# Altium PCB PCB1.PcbDoc
Units mm, origin at the board's own origin, x right, y up, seen from the top; angles counter-clockwise.
Board outline 24 x 61.98 mm, 2 copper layers (Top Layer, Bottom Layer); 16 components, 11 nets, 35 pads, 0 vias.
Unrouted connection lines stored in the file: 22.
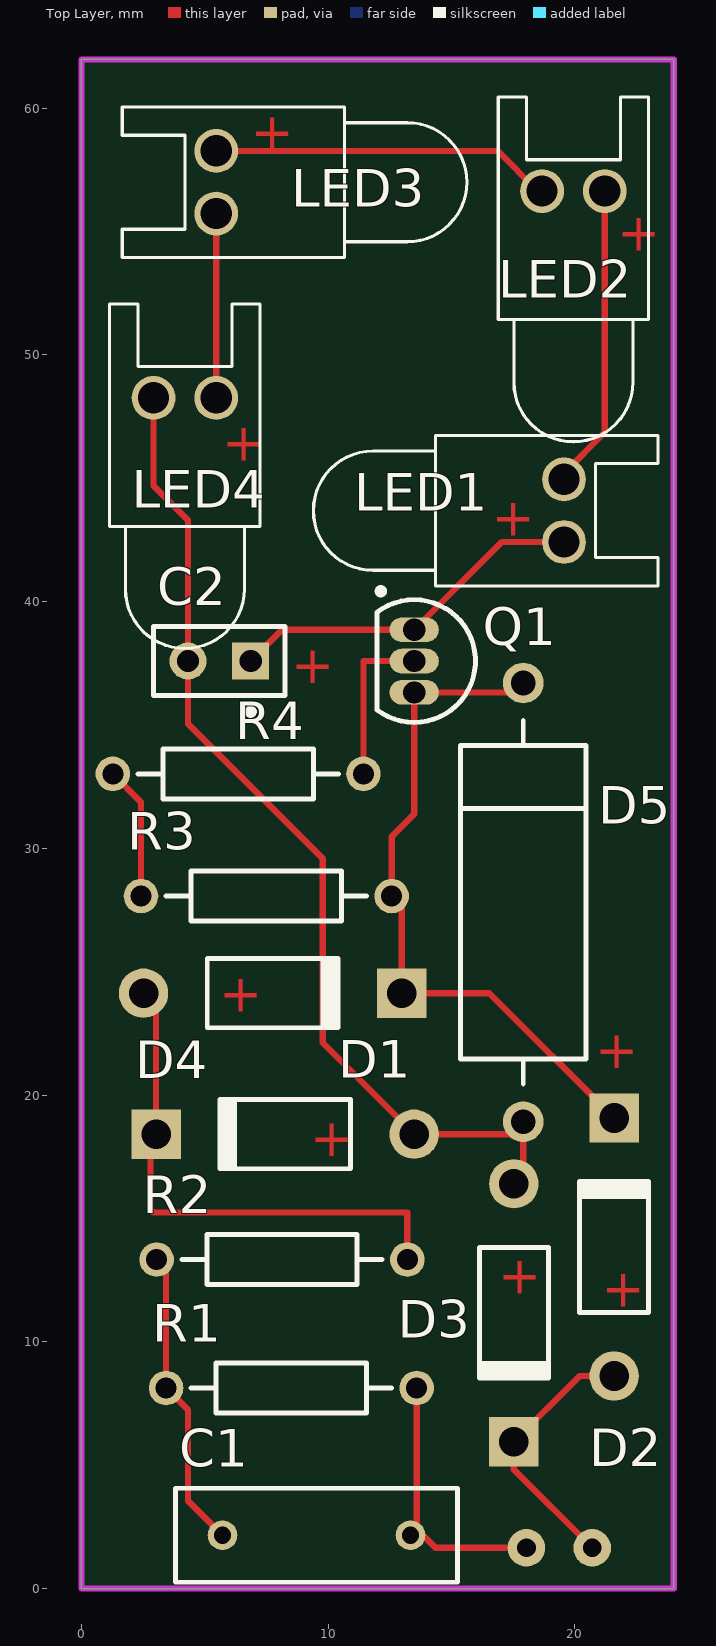
[diagram p0: Top Layer view]
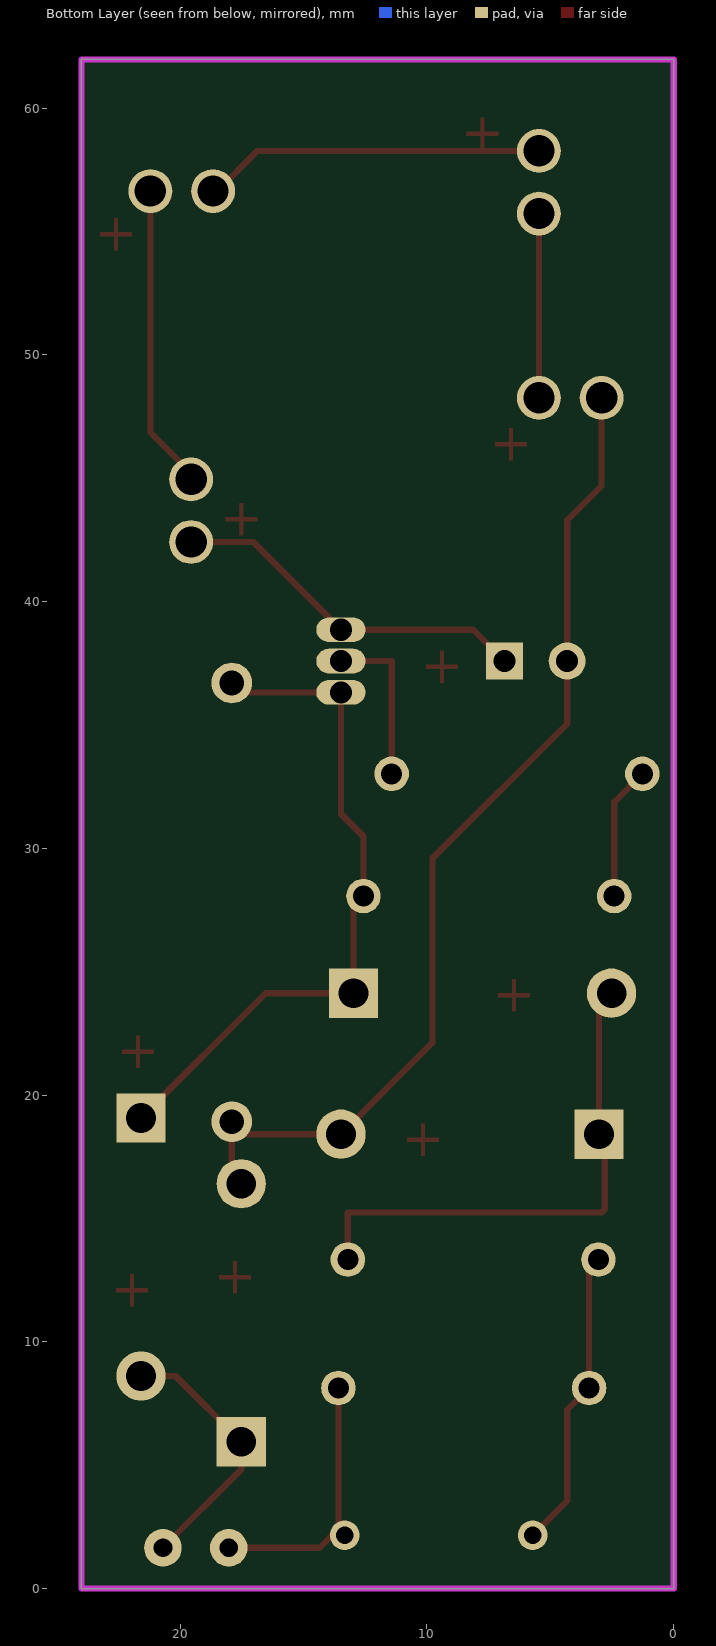
[diagram p1: Bottom Layer view, seen from below]

## Layer stack, top to bottom
Top Solder: solder mask 0.0102, Solder Resist, Dk 3.5
Top Layer: signal copper 0.0356
Dielectric 1: dielectric 0.32, FR-4, Dk 4.8
Bottom Layer: signal copper 0.0356
Bottom Solder: solder mask 0.0102, Solder Resist, Dk 3.5

## Board outline
0,0 0,61.976 24.003,61.976 24.003,0

## Design rules (kind name [scope] priority, off if disabled: settings)
Clearance [All] p1: gap=0.254 ignorepadtopadclearanceinfootprint=FALSE except(0: Arc-Hole Track-Hole SMDPad-Hole THPad-Hole Via-Hole Fill-Hole Poly-Hole Region-Hole Text-Hole)
PolygonConnect [All] p1: connectstyle=Relief reliefconductorwidth=0.254 reliefentries=4 polygonreliefangle="90 Angle" airgapwidth=0.254
RoomDefinition Sheet1 [InComponentClass('Sheet1')] p1: confinementstyle=ConfineIn formatcopy=TRUE lockcomponents=FALSE outline 30.988,38.1 115.697,38.1 115.697,60.706 30.988,60.706
RoutingVias [All] p1: holewidth=0.711 width=1.27 viastyle="Through Hole" minholewidth=0.711 minwidth=1.27 maxholewidth=0.711 maxwidth=1.27
SolderMaskExpansion [All] p1: expansion=0.102
Width [All] p1: maxlimit=0.254 minlimit=0.254 preferedwidth=0.254
30 further rules are at their usual default settings.

## Components (designator, comment, footprint, x,y, rotation, side; value= is the part's Value field where it differs from the comment)
C1 "" RAD-0.3 9.525,2.159 r180 top value=224/250V
C2 "" PIN2 6.858,37.592 r180 top value=22UF
D1 "Diode 1N4007" DO-41 7.747,24.13 r0 top
D2 "Diode 1N4007" DO-41 21.59,13.843 r90 top
D3 "Diode 1N4007" DO-41 17.526,11.176 r270 top
D4 "Diode 1N4007" DO-41 8.255,18.415 r180 top
D5 "D Zener" DIODE-0.7 17.907,27.813 r90 top
LED1 "" LED-0 19.558,43.688 r270 top
LED2 "" LED-0 19.939,56.642 r0 top
LED3 "" LED-0 5.461,57 r90 top
LED4 "" LED-0 4.191,48.26 r0 top
Q1 "2N3904" TO-92A 13.485,37.592 r180 top
R1 "" AXIAL-0.4 8.509,8.128 r180 top value=1M
R2 "" AXIAL-0.4 8.128,13.335 r0 top value=560
R3 "" AXIAL-0.4 7.493,28.067 r0 top value=150k
R4 "" AXIAL-0.4 6.35,33.02 r180 top value=22

## Footprints (in the part's own frame and the unit in brackets; to place one, negate y for a bottom-side part, rotate by r counter-clockwise, add the part's x,y. Pads: shape width x height; smd on the part's side, far side on the other; paste and mask are expansions set on the pad)
AXIAL-0.4 [mm] "Axial Device, Thru-Hole; 2 Leads; 0.4 in Pin Spacing"
  round 1.4 hole 0.85: 1(-5.08,0) 2(5.08,0)
  silkscreen extent -4.06,-1.02 4.06,1.02
DIODE-0.7 [mm] "Diode, Thru-Hole; 2 Leads; 0.7 in Pin Spacing"
  round 1.65 hole 1: 1(-8.89,0) 2(8.89,0)
  silkscreen extent -7.37,-2.54 7.37,2.54
DO-41 [mm] "Diode, Axial; Body 5.2 x 2.7 mm (LxDia. max), Lead Dia. 0.86 mm (max)"
  round 2 hole 1.2: 1(-5.23,0)
  rect 2x2 hole 1.2: 2(5.23,0)
  silkscreen extent -2.65,-1.4 2.75,1.4
LED-0 [mil] "LED; 2 Leads"
  round 70 hole 50: 1(50,0) 2(-50,0)
  silkscreen extent -120,-400 120,150
PIN2 [mm] "Photosensitive Diode; 2 Leads"
  rect 1.5x1.5 hole 0.9: 1(0,0)
  round 1.5 hole 0.9: 2(2.54,0)
  silkscreen extent -1.4,-1.4 3.94,2.17
RAD-0.3 [mm] "Radial Cap, Thru-Hole; 2 Leads; 0.3 in Pin Spacing"
  round 1.2 hole 0.7: 1(-3.81,0) 2(3.81,0)
  silkscreen extent -5.71,-1.91 5.71,1.91
TO-92A [mm] "TO, Flat Index; 3 In-Line, Axial Leads; Body Dia. 4.5mm; Leads 0.51 x 0.48 mm (max)"
  oval 2x1 hole 0.9: 1(0,-1.27) 2(0,0) 3(0,1.27)
  silkscreen extent -2.48,-2.95 1.5,2.48, body extent -2.48,-2.5 1.5,2.5, height 6.86

## Part data
C1: library part Cap, "Capacitor", LatestRevisionDate=17-Jul-2002, LatestRevisionNote="Re-released for DXP Platform.", PackageDescription="Radial Cap, Thru-Hole; 2 Leads; 0.3 in Pin Spacing", PackageReference=RAD-0.3, Published=8-Jun-2000, Publisher="Altium Limited"
C2: library part "Cap Pol2", "Polarized Capacitor (Axial)", LatestRevisionDate=17-Jul-2002, LatestRevisionNote="Re-released for DXP Platform.", PackageDescription="Polarized Capacitor; 2 Leads", PackageReference=POLAR0.8, Published=8-Jun-2000, Publisher="Altium Limited"
D1 D2 D3 D4: "1 Amp General Purpose Rectifier", Code_JEDEC=DO-204-AL, ComponentLink1Description="Manufacturer Link", ComponentLink1URL=http://www.fairchildsemi.com/, ComponentLink2Description=Datasheet, ComponentLink2URL=http://www.fairchildsemi.com/ds/1N%2F1N4001.pdf, DatasheetVersion=1998, LatestRevisionDate=17-Jul-2002, LatestRevisionNote="Re-released for DXP Platform.", PackageDescription="Diode, Axial; Body 5.2 x 2.7 mm (LxDia. max), Lead Dia. 0.86 mm (max)", PackageReference=DO-41, PackageVersion=Aug-1999, Published=8-Jun-2000, Publisher="Altium Limited"
D5: "Zener Diode", LatestRevisionDate=17-Jul-2002, LatestRevisionNote="Re-released for DXP Platform.", PackageDescription="Diode, Thru-Hole; 2 Leads; 0.7 in Pin Spacing", PackageReference=DIODE-0.7, Published=8-Jun-2000, Publisher="Altium Limited"
LED1 LED2 LED3 LED4: library part LED0, "Typical INFRARED GaAs LED", LatestRevisionDate=08-Jul-2005, LatestRevisionNote="Mech Layer 1 removed.", PackageDescription="LED; 2 Leads", PackageReference=LED-0, Published=8-Jun-2000, Publisher="Altium Limited"
Q1: "NPN General Purpose Amplifier", ComponentLink1Description="Manufacturer Link", ComponentLink1URL=http://www.fairchildsemi.com/, ComponentLink2Description=Datasheet, ComponentLink2URL=http://www.fairchildsemi.com/ds/2N%2F2N3904.pdf, DatasheetVersion=1997, LatestRevisionDate=15-Jan-2003, LatestRevisionNote="PCB Footprint 'BCY-W3/D4.7' replaced", PackageDescription="TO, Flat Index; 3 In-Line, Axial Leads; Body Dia. 4.5mm; Leads 0.51 x 0.48 mm (max)", PackageReference=TO-92A, PackageVersion=Sep-1998, Published=8-Jun-2000, Publisher="Altium Limited"
R1 R2 R3 R4: library part Res2, "Resistor", LatestRevisionDate=17-Jul-2002, LatestRevisionNote="Re-released for DXP Platform.", PackageDescription="Axial Device, Thru-Hole; 2 Leads; 0.4 in Pin Spacing", PackageReference=AXIAL-0.4, Published=8-Jun-2000, Publisher="Altium Limited"

## Free pads (board coordinates)
  round 1.524 hole 0.762: 6(18.034,1.651) 7(20.701,1.651)

## Nets (pads, with @x,y where several pads share a name; then routed paths per layer and width w, separated by ;. In a path a pad name is that pad's centre, name@x,y a point inside that pad or via, vN(x,y) a via of type N, cw(c..) or ccw(c..) an arc to the next point about the centre after c; other vN are vias at no path point)
NetC1_2: C1.2 R1.2 R2.1
NetC2_1: C2.1 LED1.1 Q1.1
NetC2_2: C2.2 D3.1 D4.1 D5.1 LED4.2
NetD1_1: D1.1 D4.2 R2.2
NetD1_2: D1.2 D2.2 D5.2 Q1.3 R3.2
NetLED1_2: LED1.2 LED2.1
NetLED2_2: LED2.2 LED3.1
NetLED3_2: LED3.2 LED4.1
NetQ1_2: Q1.2 R4.1
NetR3_1: R3.1 R4.2
~220v: C1.1 D2.1 D3.2 R1.1
copper on no net: | length 184.6
  Top Layer w0.254: 1.27,33.02 2.413,31.877 2.413,28.067 ; 2.517,24.13 3.025,23.622 3.025,18.415 ; 2.794,18.415 2.794,15.367 2.921,15.24 13.208,15.24 13.208,13.335 ; 2.921,48.26 2.921,44.704 4.318,43.307 4.318,37.592 4.318,35.052 9.779,29.591 9.779,22.121 13.485,18.415 17.399,18.415 17.907,18.923 17.907,16.764 17.653,16.51 ; 3.048,13.335 3.429,12.954 3.429,8.128 ; 3.175,8.382 4.318,7.239 4.318,3.556 5.715,2.159 ; 5.461,48.26 5.461,55.73 ; 5.461,58.27 16.868,58.27 18.496,56.642 18.669,56.642 ; 6.858,37.592 8.128,38.862 13.485,38.862 17.041,42.418 19.558,42.418 ; 11.43,33.02 11.43,37.592 13.485,37.592 ; 13.589,8.128 13.589,2.413 14.351,1.651 18.034,1.651 ; 17.526,36.322 13.485,36.322 13.485,31.392 12.573,30.48 12.573,28.067 12.977,27.663 12.977,24.13 16.533,24.13 21.59,19.073 ; 19.558,44.958 19.558,45.212 21.209,46.863 21.209,56.642 ; 20.701,1.651 17.526,4.826 17.526,5.946 20.193,8.613 21.59,8.613

## Keep-outs
Keep-Out Layer:
  the board outline again, w0.254

## Other copper
Top Layer:
  text "+" at 6.858,58.293 h1.52
  text "+" at 21.717,54.229 h1.52
  text "+" at 5.715,45.72 h1.52
  text "+" at 16.637,42.672 h1.52
  text "+" at 8.509,36.703 h1.52
  text "+" at 5.588,23.368 h1.52
  text "+" at 20.828,21.082 h1.52
  text "+" at 9.271,17.526 h1.52
  text "+" at 16.891,11.938 h1.52
  text "+" at 21.082,11.43 h1.52